# EAGLE board echo_quest_v1-0 (EAGLE 5.10)

Size 153.3 x 64.12 mm. Coordinates in mm from the lower left corner, seen from the top.
Outline: 0.44,0 153.12,0.04 153.3,64.12 0,63.86 0.44,0
Copper layers (1*16): Top 0.035mm / dielectric 1.5mm / Bottom 0.035mm
Design rules "default *": minimum track width 10mil, minimum drill 24mil, track to track 12mil, track to pad 8mil, pad to pad 8mil, via to via 8mil, smd to smd 8mil, copper to edge 40mil, drill to drill 8mil, minimum pad ring 10mil, minimum via ring 8mil, stop-mask expansion 4mil, vias tented up to drill 0mil, thermal gap 10mil
Holes 3.2 mm at 72.9,45.89

## Footprints (pad centres in the part's own frame; a part is rotated, then mirrored left to right if it is on the bottom)
050X030_025 = drill 0.7 round: 1 -1.27,0; 2 1.27,0
063_025 = drill 0.7 square: + -1.27,0 | drill 0.7 round: - 1.27,0
DO41-3 = drill 0.9 round: A 3.81,0 | drill 0.9 square: C -3.81,0
LED5MM = drill 0.9 round: A -1.27,0 | drill 0.9 square: K 1.27,0
4,16O1,6 = drill 1.6 pad 4.166 octagon: 1 0,0
ICL8038 = drill 0.813 long: 1 -7.62,-3.81; 2 -5.08,-3.81; 3 -2.54,-3.81; 4 0,-3.81; 5 2.54,-3.81; 6 5.08,-3.81; 7 7.62,-3.81; 8 7.62,3.81; 9 5.08,3.81; 10 2.54,3.81; 11 0,3.81; 12 -2.54,3.81; 13 -5.08,3.81; 14 -7.62,3.81
TO220H = drill 1.118 long: 1 -2.54,-10.16; 2 0,-10.16; 3 2.54,-10.16 | hole 3.302: 0,4.826
DIL08 = drill 0.813 pad 1.27 round: 1 -3.81,-3.81; 2 -1.27,-3.81; 3 1.27,-3.81; 4 3.81,-3.81; 5 3.81,3.81; 6 1.27,3.81; 7 -1.27,3.81; 8 -3.81,3.81
DIL08' = drill 0.7 square: 1 -3.81,-3.81 | drill 0.7 round: 2 -1.27,-3.81; 3 1.27,-3.81; 4 3.81,-3.81; 5 3.81,3.81; 6 1.27,3.81; 7 -1.27,3.81; 8 -3.81,3.81
R0204/3 = drill 0.7 round: 1 -3.81,0; 2 3.81,0
POT_ALPHA_RV16AF-20 = drill 1.5 pad 2.54 round: 1 -5,0; 2 0,0; 3 5,0
SPST = drill 0.7 square: 1 -1.27,0; 2 1.27,0
3PDT = drill 0.7 long: A1 -5.08,5.08; A2 -5.08,0; A3 -5.08,-5.08; B1 0,5.08; B2 0,0; B3 0,-5.08; C1 5.08,5.08; C2 5.08,0; C3 5.08,-5.08
DPDT = drill 0.7 long: A1 -2.54,5.08; A2 -2.54,0; A3 -2.54,-5.08; B1 2.54,5.08; B2 2.54,0; B3 2.54,-5.08
SOCKET-16 = drill 0.813 long: 1 -8.89,-3.81; 2 -6.35,-3.81; 3 -3.81,-3.81; 4 -1.27,-3.81; 5 1.27,-3.81; 6 3.81,-3.81; 7 6.35,-3.81; 8 8.89,-3.81; 9 8.89,3.81; 10 6.35,3.81; 11 3.81,3.81; 12 1.27,3.81; 13 -1.27,3.81; 14 -3.81,3.81; 15 -6.35,3.81; 16 -8.89,3.81
TO92- = drill 0.7 octagon: 1 -2.54,0; 2 0,0; 3 2.54,0

## Placement (x,y rotation side)
C1  0.1uF  [050X030_025]  23.56,16.88 270 top
C2  100uF  [063_025]  89.49,56.7 180 top
C3  47uF  [063_025]  15.58,38.52 0 top
C4  0.1uF  [050X030_025]  29.91,23.33 90 top
C5  0.1uF  [050X030_025]  29.91,17.2 270 top
C6  82nF  [050X030_025]  49.62,19.28 270 top
C7  82nF  [050X030_025]  49.88,13.03 270 top
C8  560pF  [050X030_025]  49.62,25.63 270 top
C9  47uF  [063_025]  15.38,29.92 0 top
C10  3.3nF  [050X030_025]  68.21,20.06 270 top
C11  560pF  [050X030_025]  49.62,31.98 270 top
C12  4.7uF  [063_025]  41.18,12.43 0 top
C13  0.01uF  [050X030_025]  23.63,23.33 270 top
C14  10uF  [063_025]  55.8,43.28 90 top
C15  4.7uF  [063_025]  49.23,37.6 90 top
C16  3.9n  [050X030_025]  35.61,44.23 0 top
C17  4.7uF  [050X030_025]  43.26,44.52 180 top
C18  47uF  [063_025]  99.57,68.28 0 top  (outside the outline)
C19  100uF  [063_025]  91.52,70.68 0 top  (outside the outline)
C20  0.1uF  [050X030_025]  218.43,64.76 0 top  (outside the outline)
C21  100uF  [063_025]  192.65,59.43 0 top  (outside the outline)
C22  0.1uF  [050X030_025]  172.87,45.96 0 top  (outside the outline)
C23  0.1uF  [050X030_025]  259.5,86.59 0 top  (outside the outline)
C24  0.1uF  [050X030_025]  258.88,79.08 0 top  (outside the outline)
C25  0.1uF  [050X030_025]  256.88,20.67 0 top  (outside the outline)
C26  0.1uF  [050X030_025]  257.54,46.89 0 top  (outside the outline)
C27  0.1uF  [050X030_025]  256.21,13.16 0 top  (outside the outline)
C28  100uF  [063_025]  -3.78,-78.05 0 top  (outside the outline)
C29  47uF  [063_025]  -11.87,-84.28 0 top  (outside the outline)
D1  1n4148  [DO41-3]  96.32,56.54 90 top
D2  LED5MM  [LED5MM]  70.45,-27.34 0 top  (outside the outline)
D3  1n4148  [DO41-3]  260.48,67.39 0 top  (outside the outline)
D4  1n4148  [DO41-3]  260.48,61.92 0 top  (outside the outline)
D5  1n4148  [DO41-3]  4.89,-66.54 0 top  (outside the outline)
DC_JACK-PIN  [4,16O1,6]  108.16,52.3 90 top
DC_JACK-SLEEVE  [4,16O1,6]  105.58,58.12 90 top
IC1  ICL8038  [ICL8038]  134.95,39.52 0 top
IC2  7812T  [TO220H]  84.28,78.5 0 top  (outside the outline)
IC3  UA741P  [DIL08]  136.02,22.67 0 top
IC4  NE5532N  [DIL08']  122.55,22.62 0 top
IN_SLEEVE  [4,16O1,6]  74.02,35.73 180 top
IN_TIP  [4,16O1,6]  74.11,30.15 180 top
OUT_SLEEVE  [4,16O1,6]  67.75,45.9 180 top
OUT_TIP  [4,16O1,6]  62.2,45.89 180 top
R1  1k  [R0204/3]  22.95,10.43 0 top
R2  50k  [POT_ALPHA_RV16AF-20]  20.74,-11.93 0 top  (outside the outline)
R3  10k  [R0204/3]  60.27,34.65 270 top
R4  10k  [R0204/3]  59.68,20.43 180 top
R5  15k  [R0204/3]  59.66,15.86 180 top
R6  10k  [R0204/3]  64.52,34.65 90 top
R7  10k  [R0204/3]  55.95,34.65 90 top
R8  4.7k  [R0204/3]  68.9,34.65 90 top
R9  5.6k  [R0204/3]  59.68,11.54 180 top
R10  20k  [POT_ALPHA_RV16AF-20]  69.6,-12.91 0 top  (outside the outline)
R11  3.3k  [R0204/3]  65.3,-32.14 90 top  (outside the outline)
R12  15k  [R0204/3]  31.94,32.25 90 top
R13  100k  [R0204/3]  26.85,32.28 90 top
R14  470  [R0204/3]  21.42,32.22 90 top
R15  20k  [POT_ALPHA_RV16AF-20]  20.71,-30.96 0 top  (outside the outline)
R16  100k  [POT_ALPHA_RV16AF-20]  117.61,-31.03 0 top  (outside the outline)
R17  10k  [R0204/3]  202.38,57.61 0 top  (outside the outline)
R18  10k  [R0204/3]  194.25,50.72 0 top  (outside the outline)
R19  1k  [R0204/3]  193.71,28.14 0 top  (outside the outline)
R20  1k  [R0204/3]  193.71,21.87 0 top  (outside the outline)
R21  1k  [R0204/3]  193.71,15.6 0 top  (outside the outline)
R22  100k  [POT_ALPHA_RV16AF-20]  118.01,-15.2 0 top  (outside the outline)
R23  47  [R0204/3]  -2.13,-86.1 0 top  (outside the outline)
R24  ????  [R0204/3]  175.76,-6.8 0 top  (outside the outline)
R25  1M  [R0204/3]  175.18,52.67 0 top  (outside the outline)
R26  100k  [R0204/3]  261.81,99.57 0 top  (outside the outline)
R27  100k  [R0204/3]  261.81,93.3 0 top  (outside the outline)
R28  1M  [R0204/3]  260.48,72.01 0 top  (outside the outline)
R29  100k  [R0204/3]  259.14,39.83 0 top  (outside the outline)
R30  100k  [R0204/3]  259.14,33.6 0 top  (outside the outline)
R31  100k  [R0204/3]  259.14,27.34 0 top  (outside the outline)
R32  100k  [R0204/3]  257.81,6.09 0 top  (outside the outline)
R33  10k  [R0204/3]  69.56,-61.92 0 top  (outside the outline)
R34  10k  [R0204/3]  4.85,-73.61 0 top  (outside the outline)
R35  10k  [R0204/3]  4.8,-79.88 0 top  (outside the outline)
SW1  SPST  [SPST]  192.42,44.45 0 top  (outside the outline)
SW2  SPST  [SPST]  82.59,53.99 90 top
SW3  SPST  [SPST]  192.25,39.03 0 top  (outside the outline)
SW4  SPST  [SPST]  192.07,33.6 0 top  (outside the outline)
SW5  3PDT  [3PDT]  19.96,-49.52 0 top  (outside the outline)
SW6  DPDT  [DPDT]  69.79,-47.96 0 top  (outside the outline)
SW7  DPDT  [DPDT]  116.15,-47.29 0 top  (outside the outline)
U1  PT2399  [SOCKET-16]  39.81,28.57 270 top
U2  LM7805  [TO92-]  80.78,60.04 180 top

## Library data of the parts
C1 C4-C8 C10 C11 C13 C16 C17 C20 C22-C27 = gm-caps-ceramic
C2 C3 C9 C12 C14 C15 C18 C19 C21 C28 C29 = gm-caps-electro-pol
D1-D5 = gm-diodes
DC_JACK-PIN DC_JACK-SLEEVE IN_SLEEVE IN_TIP OUT_SLEEVE OUT_TIP = wirepad
IC1 = 00_steve
IC2 U2 = gm-regulators
IC3 = linear
IC4 = gm-ics
R1 R3-R9 R11-R14 R17-R21 R23-R35 = gm-resistors
R2 R10 R15 R16 R22 = SparkFun
SW1-SW7 = gm-switches
U1 = ic-package

## Nets
BYPASS: SW5.A3 SW5.C3
C5*: C5.1 U1.8
DELAY_IN: C17.2 R13.2 SW5.A1
DELAY_OUT: C14.- SW5.C1
GND: C1.2 C2.- C3.- C4.2 C5.2 C9.- C10.2 C13.2 C16.2 C18.- C19.- C20.2 C21.- C29.- D3.A D4.C DC_JACK-PIN.1 IC1.11 IC2.2 IC3.4 IN_SLEEVE.1 OUT_SLEEVE.1 R2.1 R2.2 R10.3 R13.1 R14.1 R15.3 R16.1 R22.1 R24.1 R25.1 R28.1 R34.1 U1.3 U1.4 U2.2
IN(UNBUFFERED): C22.1 IN_TIP.1 R25.2
LFO: C28.- SW7.B2
N$1: C17.1 R12.2
N$2: C4.1 U1.7
N$3: C7.2 U1.9
N$4: C7.1 U1.10
N$5: C10.1 R3.2 R4.2 R5.2
N$6: C6.1 R3.1 U1.12
N$7: R1.2 U1.6
N$8: R1.1 R2.3 SW7.B1
N$9: C3.+ U1.2
N$10: R10.2 SW6.B2
N$11: R33.2 SW6.B3
N$12: C8.2 R4.1 U1.13
N$14: C11.2 R6.1 R8.1 U1.15
N$15: C11.1 R7.1 U1.16
N$16: C12.+ C13.1 R9.2
N$17: C6.2 U1.11
N$18: R19.2 SW1.1
N$19: C12.- R10.1
N$20: C15.+ C16.1 R6.2 R7.2 R12.1
N$21: C15.- SW6.A2
N$22: R20.2 SW3.1
N$23: R21.2 SW4.1
N$24: R22.3 SW1.2 SW3.2 SW4.2
N$25: C14.+ R8.2
N$26: C8.1 R5.1 R9.1 U1.14
N$27: IC1.8 R16.2
N$28: C21.+ IC1.10
N$29: D2.K R14.2
N$30: D1.A DC_JACK-SLEEVE.1
N$31: D1.C SW2.1
N$32: IC1.5 R17.2 R34.2
N$33: IC1.4 R18.2
N$34: C9.+ C18.+ IC2.1 SW2.2 U2.3
N$35: IC3.3 R22.2
N$36: IC1.9 R21.1
N$37: IC1.2 R20.1
N$38: IC1.3 R19.1
N$39: IC3.2 IC3.6 R35.1
N$40: IC1.12 R24.2
N$41: C22.2 R26.2
N$42: C23.1 IC4.2 R26.1 R27.2
N$43: C23.2 C24.1 IC4.1 R27.1
N$45: R11.2 R15.1
N$46: D3.C D4.A R15.2 SW6.B1
N$47: C25.2 C26.1 IC4.7 R31.2
N$48: IC4.3 R29.1
N$49: IC4.5 R30.1
N$51: C25.1 IC4.6 R31.1 R32.2
N$52: D2.A SW5.B1
N$53: C27.2 R32.1
N$54: C24.2 SW5.A2
N$55: C27.1 SW5.C2
N$56: R33.1 SW6.A3
N$57: R11.1 SW6.A1
N$58: D5.C R17.1 R18.1
N$59: C28.+ R35.2
OUT(BUFFERED): C26.2 OUT_TIP.1 R28.2
V+: IC4.8
V-: IC4.4
VA: C1.1 C2.+ C29.+ R23.1 R23.2 R29.2 R30.2 SW5.B2 U1.1 U2.1
VB: C19.+ C20.1 D5.A IC1.6 IC2.3 IC3.7 R16.3

## Tracks (layer width: path | path; a pad name or v marks a point on that pad's centre or on a via)
BYPASS  (1 unrouted)
C5*  (1 unrouted)
DELAY_IN  (2 unrouted)
DELAY_OUT  (1 unrouted)
GND  (36 unrouted)
IN(UNBUFFERED)  (2 unrouted)
LFO  (1 unrouted)
N$1  (1 unrouted)
N$2  (1 unrouted)
N$3  (1 unrouted)
N$4  (1 unrouted)
N$5  (3 unrouted)
N$6  (2 unrouted)
N$7  (1 unrouted)
N$8  (2 unrouted)
N$9  (1 unrouted)
N$10  (1 unrouted)
N$11  (1 unrouted)
N$12  (2 unrouted)
N$14  (3 unrouted)
N$15  (2 unrouted)
N$16  (2 unrouted)
N$17  (1 unrouted)
N$18  (1 unrouted)
N$19  (1 unrouted)
N$20  (4 unrouted)
N$21  (1 unrouted)
N$22  (1 unrouted)
N$23  (1 unrouted)
N$24  (3 unrouted)
N$25  (1 unrouted)
N$26  (3 unrouted)
N$27  (1 unrouted)
N$28  (1 unrouted)
N$29  (1 unrouted)
N$30  (1 unrouted)
N$31  (1 unrouted)
N$32  (2 unrouted)
N$33  (1 unrouted)
N$34  (4 unrouted)
N$35  (1 unrouted)
N$36  (1 unrouted)
N$37  (1 unrouted)
N$38  (1 unrouted)
N$39  (2 unrouted)
N$40  (1 unrouted)
N$41  (1 unrouted)
N$42  (3 unrouted)
N$43  (3 unrouted)
N$45  (1 unrouted)
N$46  (3 unrouted)
N$47  (3 unrouted)
N$48  (1 unrouted)
N$49  (1 unrouted)
N$51  (3 unrouted)
N$52  (1 unrouted)
N$53  (1 unrouted)
N$54  (1 unrouted)
N$55  (1 unrouted)
N$56  (1 unrouted)
N$57  (1 unrouted)
N$58  (2 unrouted)
N$59  (1 unrouted)
OUT(BUFFERED)  (2 unrouted)
VA  (9 unrouted)
VB  (6 unrouted)

## Text on the board
tPlace: SW2 | C14 | S | T | C16 | C17 | D2 | 9V Battery | C3 | - | C15 | OUT | IN | S | + | U1 | C9 | R7 | R3 | R6 | R8 | C | R14 | R13 | R12 | C11 | T | C2 | P | C13 | C8 | C4 | R11 | C10 | DC Jack | S | R4 | C1 | C6 | U2 | C5 | C7 | R5 | R1 | C12 | R2 | R9 | D1 | R15 | R10